# Altium PCB AMU_POC_final.PcbDoc
Units mm, origin at the board's own origin, x right, y up, seen from the top; angles counter-clockwise.
Board outline 33 x 111 mm, 4 copper layers (Top Layer, Mid-Layer 1, GNDplane, Bottom Layer); 83 components, 77 nets, 258 pads, 120 vias.
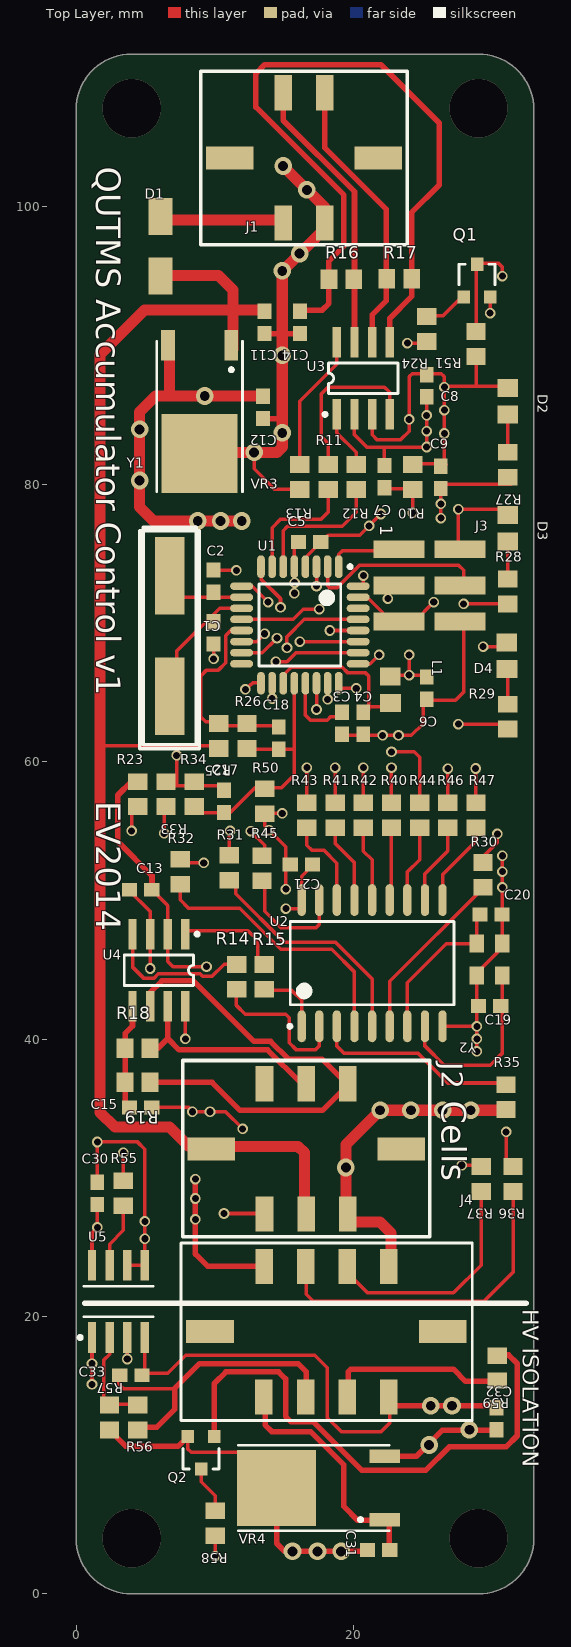
[diagram p0: Top Layer view]
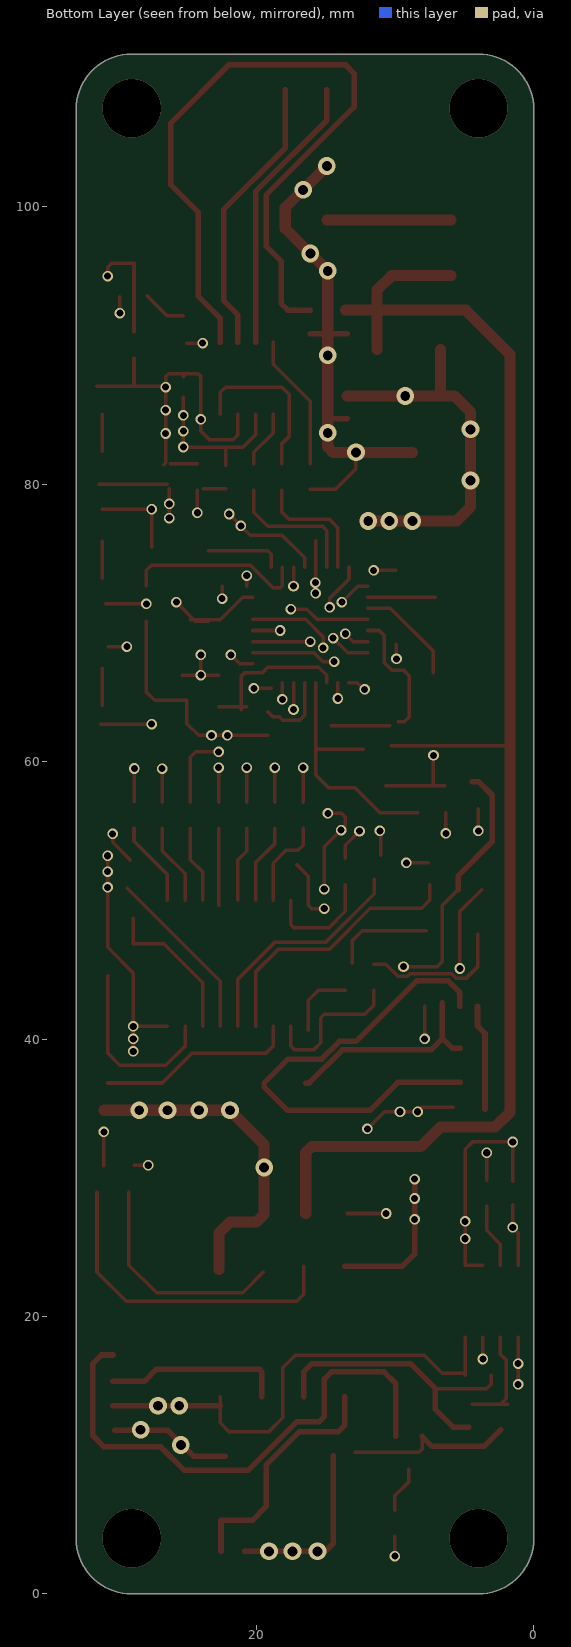
[diagram p1: Bottom Layer view, seen from below]
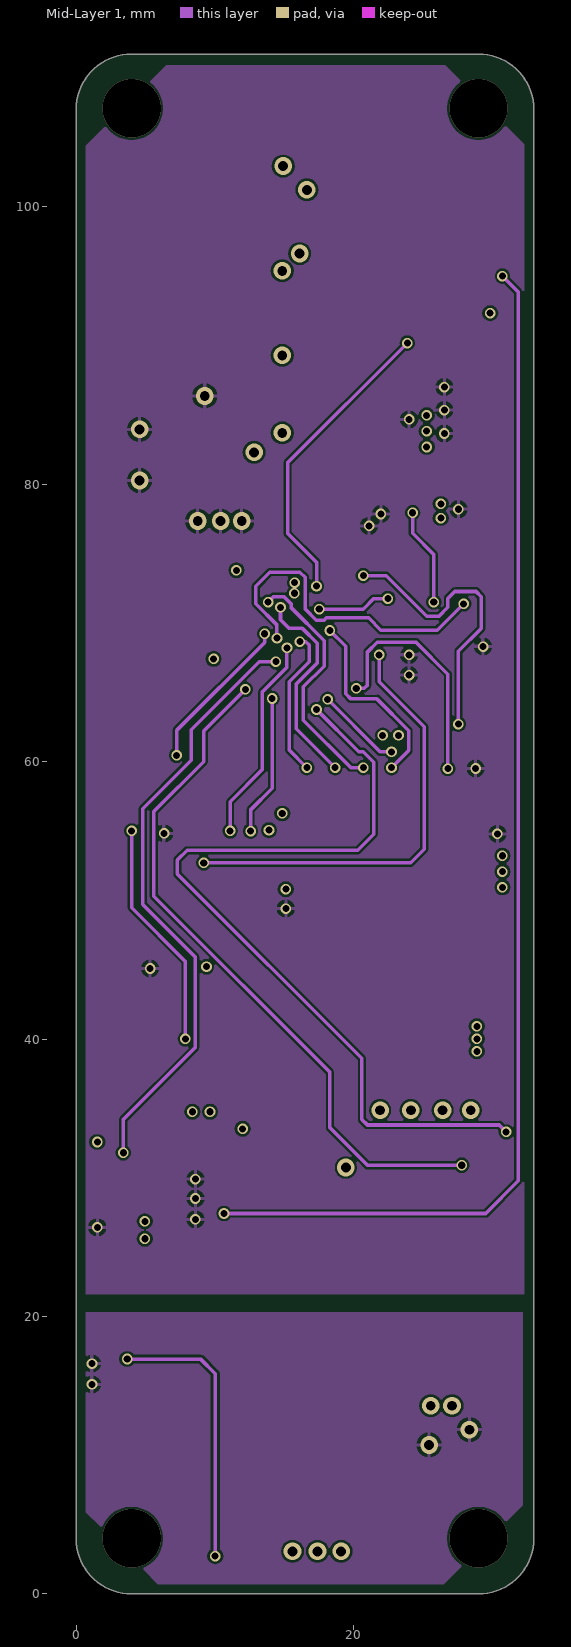
[diagram p2: Mid-Layer 1]
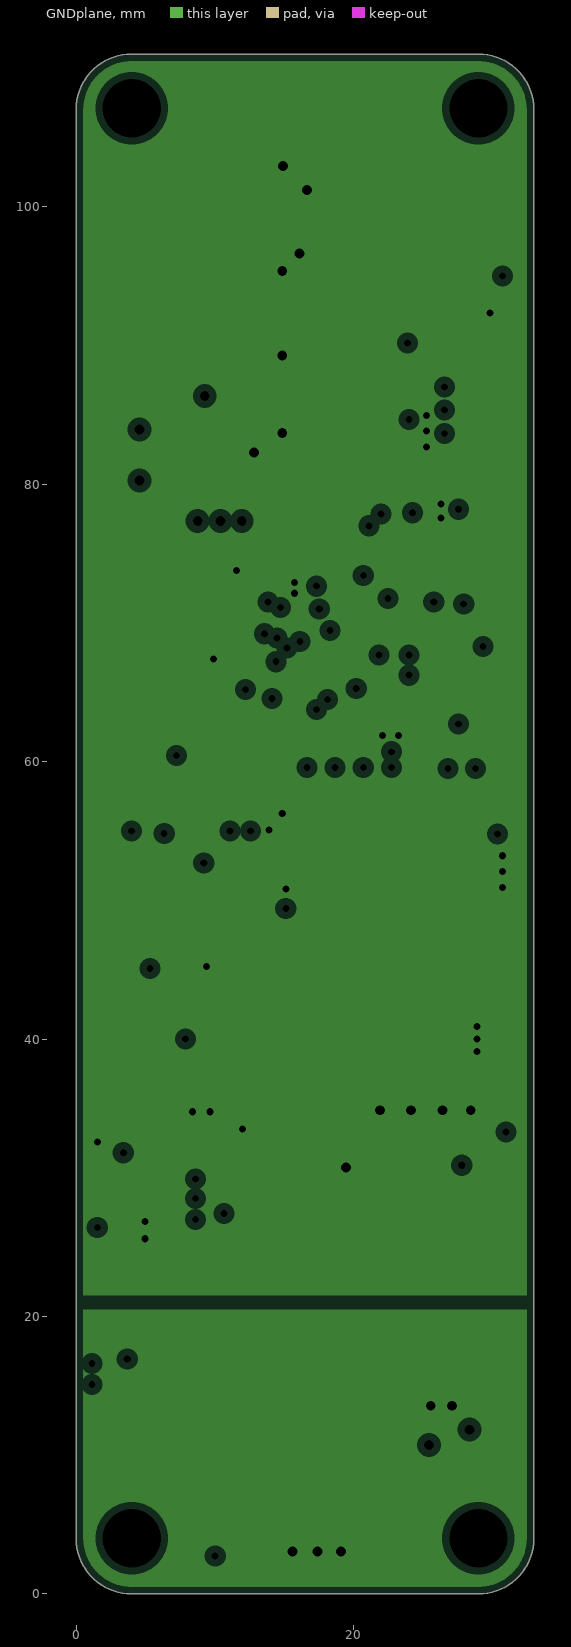
[diagram p3: GNDplane, clearances drawn from the general rule]
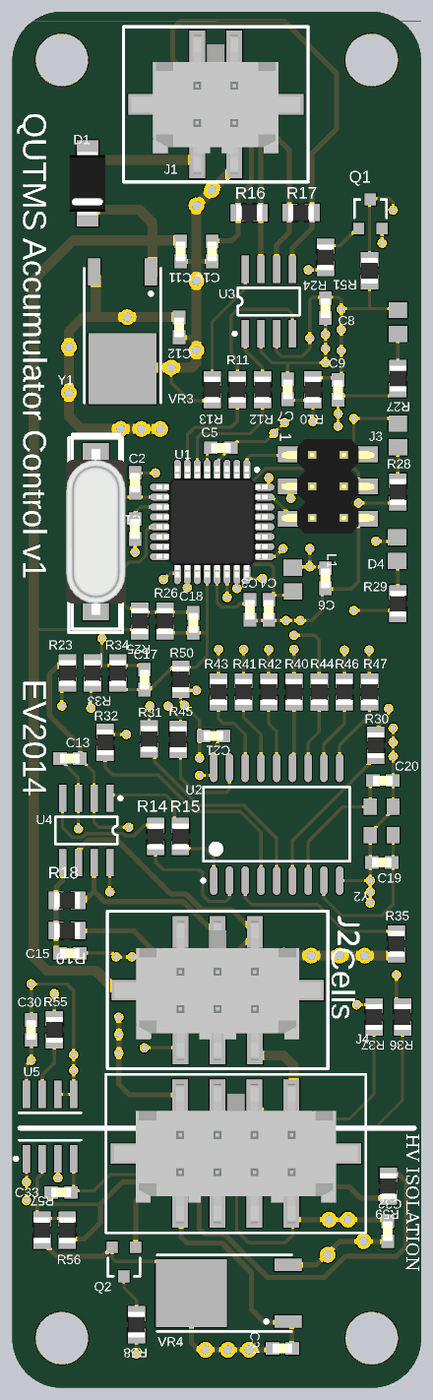
[diagram p4: 3D render of the assembled board from above, using the file's embedded part models]

## Layer stack, top to bottom
Top Solder: solder mask 0.0102, Solder Resist, Dk 3.5
Top Layer: signal copper 0.0356
Dielectric1: core 0.32, FR-4, Dk 4.8
Mid-Layer 1: signal copper 0.0356
Dielectric2: prepreg 0.32, FR-4, Dk 4.8
GNDplane: plane copper 0.0356, net (Multiple Nets)
Dielectric3: core 0.32, FR-4, Dk 4.8
Bottom Layer: signal copper 0.0356
Bottom Solder: solder mask 0.0102, Solder Resist, Dk 3.5

## Board outline
0,4 ccw(c4,4) 4,0 29,0 ccw(c29,4) 33,4 33,107 ccw(c29,107) 29,111 4,111 ccw(c4,107) 0,107

## Design rules (kind name [scope] priority, off if disabled: settings)
Clearance [All] p1: gap=0.18
FabricationTestPointUsage TestPointUsage [All] p1: valid=0 allowmultiple=FALSE
FabricationTestpoint Testpoint [All] p1: side=3 testpointundercomponent=TRUE minsize=1.016 maxsize=2.54 preferedsize=1.524 minholesize=0 maxholesize=1.016 preferedholesize=0.813 testpointgrid=0.025 allowsidetop=TRUE allowsidebottom=TRUE usegrid=TRUE gridtolerance=0
PlaneClearance [All] p1: clearance=0.508
PlaneConnect [All] p1: planeconnectstyle=Relief reliefexpansion=0.508 reliefentries=4 reliefconductorwidth=0.254 reliefairgap=0.254
PolygonConnect [All] p1: connectstyle=Relief reliefconductorwidth=0.254 reliefentries=4 polygonreliefangle="90 Angle" airgapwidth=0.254
RoutingVias [All] p1: holewidth=0.711 width=1.27 viastyle="Through Hole" minholewidth=0.2 minwidth=0.5 maxholewidth=10 maxwidth=10
SilkToSolderMaskClearance SilkscreenOverComponentPads [IsPad] p1: minsilkscreentomaskgap=0.254 clearancetoexposedcopper=TRUE
SolderMaskExpansion SolderMaskExpansion_1 [(IsVia)] p1: expansion=-1
SolderMaskExpansion [All] p2: expansion=0.106
Width [All] p1: maxlimit=10 minlimit=0.2 preferedwidth=0.254 minimp=50.000000 maximp=50.000000 favimp=50.000000
25 further rules are at their usual default settings.

## Components (designator, comment, footprint, x,y, rotation, side; value= is the part's Value field where it differs from the comment)
C1 "Cap Semi" 0603C 9.906,72.985 r270 top
C2 "Cap Semi" 0603C 9.906,69.302 r90 top
C3 "Cap Semi" 0603C 19.177,62.737 r270 top
C4 "Cap Semi" 0603C 20.701,62.737 r270 top
C5 "Cap Semi" 0603C 16.803,75.818 r180 top
C6 "Cap Semi" 0603C 25.273,65.277 r270 top
C7 "Cap Semi" 0603C 22.225,80.517 r270 top
C8 "Cap Semi" 0603C 25.273,87.121 r90 top
C9 "Cap Semi" 0603C 26.289,80.517 r90 top
C11 "Cap Semi" 0603C 13.589,91.693 r90 top
C12 "Cap Semi" 0603C 13.462,85.558 r90 top
C13 "Cap Semi" 0603C 4.619,50.758 r180 top
C14 "Cap Semi" 0603C 16.129,91.693 r90 top
C15 "Cap Semi" 0603C 4.625,35.05 r180 top
C17 "Cap Semi" 0603C 10.668,57.149 r90 top
C18 "Cap Semi" 0603C 14.605,61.721 r90 top
C19 "Cap Semi" 0603C 29.784,42.376 r180 top
C20 "Cap Semi" 0603C 29.884,48.976 r180 top
C21 "Cap Semi" 0603C 16.256,52.577 r0 top
C30 "Cap Semi" 0603C 1.524,28.892 r90 top
C31 "Cap Semi" 0603C 21.775,3.175 r180 top
C32 "Cap Semi" 0603C 30.3,12.65 r90 top
C33 "Cap Semi" 0603C 3.928,15.76 r180 top
D1 "1N4004" DO-214AC 6.075,97.15 r270 top
D2 "Green" 2012[0805]_LED 31.115,85.978 r180 top
D3 "Yellow" 2012[0805]_LED 31.115,76.834 r180 top
D4 "Red" 2012[0805]_LED 31.05,67.65 r180 top
J1 "Header 2X2" "MOLEX 4 PIN" 16.425,103.525 r0 top
J2 "Header 3X2" "Molex 6 Pin" 16.575,32.05 r0 top
J3 "ISP header" "ISP Header" 25.473,72.697 r270 top
J4 "Header 4X2" MOLEX_8 18.05,18.9 r0 top
L1 "Inductor" 2012[0805]_IND 23.4,66.8 r180 top
Q1 "2N7002" SOT23A 28.9,94.675 r0 top
Q2 "2N7002" SOT23A 9.008,10.172 r180 top
R10 "Res1" 2012[0805]_Res 24.257,80.517 r90 top
R11 "Res1" 2012[0805]_Res 18.161,80.517 r270 top
R12 "Res1" 2012[0805]_Res 20.193,80.517 r90 top
R13 "Res1" 2012[0805]_Res 16.129,80.517 r90 top
R14 "Res1" 2012[0805]_Res 11.575,44.475 r270 top
R15 "Res1" 2012[0805]_Res 13.575,44.475 r270 top
R16 "Res3" 2012[0805]_Res 19.125,94.775 r180 top
R17 "Res3" 2012[0805]_Res 23.3,94.8 r180 top
R18 "Res3" 2012[0805]_Res 4.425,39.325 r0 top
R19 "Res3" 2012[0805]_Res 4.425,36.875 r180 top
R23 "Res1" 2012[0805]_Res 4.445,57.657 r270 top
R24 "Res1" 2012[0805]_Res 25.273,91.185 r90 top
R25 "Res1" 2012[0805]_Res 10.287,61.848 r90 top
R26 "Res1" 2012[0805]_Res 12.319,61.848 r270 top
R27 "Res1" 2012[0805]_Res 31.115,81.406 r90 top
R28 "Res1" 2012[0805]_Res 31.115,72.262 r270 top
R29 "Res1" 2012[0805]_Res 31.115,63.245 r270 top
R30 "Res1" 2012[0805]_Res 29.328,51.828 r270 top
R31 "Res1" 2012[0805]_Res 11.04,52.336 r270 top
R32 "Res1" 2012[0805]_Res 7.493,52.069 r270 top
R33 "Res1" 2012[0805]_Res 6.477,57.657 r90 top
R34 "Res1" 2012[0805]_Res 8.509,57.657 r270 top
R35 "Res1" 2012[0805]_Res 30.988,35.813 r270 top
R36 "Res1" 2012[0805]_Res 31.496,29.908 r90 top
R37 "Res1" 2012[0805]_Res 29.196,29.908 r90 top
R40 "Res1" 2012[0805]_Res 22.733,56.133 r270 top
R41 "Res1" 2012[0805]_Res 18.669,56.133 r270 top
R42 "Res1" 2012[0805]_Res 20.701,56.133 r270 top
R43 "Res1" 2012[0805]_Res 16.637,56.133 r270 top
R44 "Res1" 2012[0805]_Res 24.775,56.125 r270 top
R45 "Res1" 2012[0805]_Res 13.4,52.3 r270 top
R46 "Res1" 2012[0805]_Res 26.797,56.133 r270 top
R47 "Res1" 2012[0805]_Res 28.829,56.133 r270 top
R50 "Res1" 2012[0805]_Res 13.589,57.149 r270 top
R51 "Res1" 2012[0805]_Res 28.825,90.1 r90 top
R55 "Res1" 2012[0805]_Res 3.4,28.88 r270 top
R56 "Res1" 2012[0805]_Res 4.436,12.712 r90 top
R57 "Res1" 2012[0805]_Res 2.404,12.712 r90 top
R58 "Res1" 2012[0805]_Res 10.024,5.092 r90 top
R59 "Res1" 2012[0805]_Res 30.344,16.268 r90 top
U1 "ATmega64M1-16AU" 32A_N 16.129,69.849 r270 top
U2 "MCP2515-I/SO" SOL-18_N 21.336,45.465 r90 top locked
U3 "TJA1040" SO8 20.701,87.629 r0 top
U4 "TJA1040" SO8 5.969,44.957 r180 top
U5 "ACPL-C87A" SO8 3.048,21.081 r0 top
VR3 "MC78M05ACDT" 369A-13 8.9,85.9 r180 top
VR4 "MC78M05ACDT" 369A-13 18.152,7.632 r90 top
Y1 "16MHz" Crystal 5.7,76.2 r270 top
Y2 "XTAL" MCP2515_XTAL 28.2,43.75 r0 top

## Footprints (in the part's own frame and the unit in brackets; to place one, negate y for a bottom-side part, rotate by r counter-clockwise, add the part's x,y. Pads: shape width x height; smd on the part's side, far side on the other; paste and mask are expansions set on the pad)
32A_N [mm] "Thin QFP, 32-Leads, Body 7x7mm, Pitch 0.8mm, IPC Medium Density"
  oval 1.65x0.55 smd: 1(-4.2,2.8) 2(-4.2,2) 3(-4.2,1.2) 4(-4.2,0.4) 5(-4.2,-0.4) 6(-4.2,-1.2) 7(-4.2,-2) 8(-4.2,-2.8) 17(4.2,-2.8) 18(4.2,-2) 19(4.2,-1.2) 20(4.2,-0.4) 21(4.2,0.4) 22(4.2,1.2) 23(4.2,2) 24(4.2,2.8)
  oval 0.55x1.65 smd: 9(-2.8,-4.2) 10(-2,-4.2) 11(-1.2,-4.2) 12(-0.4,-4.2) 13(0.4,-4.2) 14(1.2,-4.2) 15(2,-4.2) 16(2.8,-4.2) 25(2.8,4.2) 26(2,4.2) 27(1.2,4.2) 28(0.4,4.2) 29(-0.4,4.2) 30(-1.2,4.2) 31(-2,4.2) 32(-2.8,4.2)
  silkscreen extent -4.32,-2.95 2.95,3.75, body extent -4.5,-4.5 4.5,4.5, height 1.1
369A-13 [mm] "TO, Flat Index; 3 In-Line, Axial Leads; Body Dia. 4.6mm; Lead Dia. 0.5 mm (max)"
  rect 1x2.2 smd: 1(-2.285,-4.1) 3(2.285,-4.1)
  rect 5.5x5.7 smd: 4(0,3.7)
  silkscreen extent -3.09,-4.4 3.08,6.45
0603C [mm] "Chip Resistor; Body 1.6 x 0.8 mm (LxW typ)"
  rect 1.1x1 smd: 1(-0.825,0) 2(0.775,0)
  body extent -0.82,-0.4 0.78,0.4, height 0.8
2012[0805]_IND [mm]
  rect 1.5x1.3 smd: 1(0.75,0.65) 2(0.748,2.566)
  body extent 0.1,0.2 1.4,3, height 1.5
2012[0805]_LED [mm]
  rect 1.5x1.3 smd: 1(0,-0.95) 2(-0.002,0.966)
  body extent -0.65,-1.4 0.65,1.4, height 1
2012[0805]_Res [mm] "2012[0805] Resistor"
  rect 1.2x1.4 smd: 1(-0.9,0) 2(0.9,0)
  body extent -1.05,-0.67 1.05,0.68, height 0.6
Crystal [mm]
  rect 5.6x2.1 smd: 1(2.8,1.05) 2(11.5,1.05)
  silkscreen extent -0.7,-0.85 15,2.95, body extent 0.45,-1.35 13.85,3.45, height 4
DO-214AC [mm]
  rect 2.65x1.75 smd: 1(-2.15,0) 2(2.15,0)
  body extent -2.64,-1.47 2.64,1.45, height 2.41
"ISP Header" [mm]
  rect 1.27x3.68 smd: 1(-2.6,-2.2) 2(-2.6,2.2) 3(0,-2.2) 4(0,2.2) 5(2.6,-2.2) 6(2.6,2.2)
  body extent -3.81,-3.75 3.81,3.75, height 9.7
MCP2515_XTAL [mm]
  rect 1.05x1.3 smd: 1(0.684,3.126) 2(2.534,0.826) 3(0.684,0.826) 4(2.534,3.126)
"MOLEX 4 PIN" [mm]
  rect 1.27x2.54 smd: 1(1.5,-4.7) 2(-1.5,-4.7) 3(1.5,4.7) 4(-1.5,4.7)
  rect 3.43x1.65 smd: 5(-5.35,0) 6(5.35,0)
  silkscreen extent -7.45,-6.25 7.45,6.25, body extent -6.83,-5.61 6.83,5.59, height 9.95
"Molex 6 Pin" [mm]
  rect 1.27x2.54 smd: 1(3,-4.675) 2(0,-4.675) 3(-3,-4.675) 4(3,4.725) 5(0,4.725) 6(-3,4.725)
  rect 3.43x1.65 smd: 8(-6.85,0.025) 9(6.85,0.025)
  silkscreen extent -8.9,-6.3 8.9,6.4, body extent -8.33,-5.61 8.33,5.59, height 9.95
MOLEX_8 [mm] "SOP, 8-Leads, Body 5.3x5.3mm, Pitch 1.27mm, IPC High Density"
  rect 1.27x2.54 smd: 1(4.485,-4.7) 2(1.485,-4.7) 3(-1.5,-4.7) 4(-4.515,-4.7) 5(4.485,4.7) 6(1.485,4.7) 7(-1.5,4.7) 8(-4.502,4.708)
  rect 3.43x1.65 smd: ""(-8.4,0) ""(8.37,0)
  silkscreen extent -10.5,-6.4 10.5,6.4, body extent -9.82,-5.61 9.82,5.59, height 9.95
SO8 [mm] "SOP, 8-Leads, Body 5.3x5.3mm, Pitch 1.27mm, IPC High Density"
  rect 0.6x2.2 smd: 1(-1.905,-2.6) 2(-0.635,-2.6) 3(0.635,-2.6) 4(1.905,-2.6) 5(1.905,2.6) 6(0.635,2.6) 7(-0.635,2.6) 8(-1.905,2.6)
  silkscreen extent -2.88,-2.72 2.5,1.1
SOL-18_N [mm] "SOIC, 18-Leads, Body 11.6x7.5mm, Pitch 1.27mm, IPC Medium Density"
  oval 2.3x0.6 smd: 1(-4.55,5.08) 2(-4.55,3.81) 3(-4.55,2.54) 4(-4.55,1.27) 5(-4.55,0) 6(-4.55,-1.27) 7(-4.55,-2.54) 8(-4.55,-3.81) 9(-4.55,-5.08) 10(4.55,-5.08) 11(4.55,-3.81) 12(4.55,-2.54) 13(4.55,-1.27) 14(4.55,0) 15(4.55,1.27) 16(4.55,2.54) 17(4.55,3.81) 18(4.55,5.08)
  silkscreen extent -4.67,-5.9 3,6.05, body extent -3.8,-5.95 3.8,5.95, height 2.65
SOT23A [mm] "SOT-23; 3 Leads; Body 3.0 x 2.5 mm, inc. leads (LxW max)"
  rect 0.9x0.95 smd: 1(-0.95,-1.175) 2(0.95,-1.175) 3(0,1.175)
  silkscreen extent -1.3,-0.3 1.3,1.18

## Part data
C1 C2 C3 C4 C5 C6 C7 C8 C9 C11 C12 C13 C14 C15 C17 C18 C19 C20 C21 C30 C31 C32 C33: "Capacitor (Semiconductor SIM Model)"
D1: library part Diode, "Default Diode"
D2 D3 D4: library part LED2, "Typical RED, GREEN, YELLOW, AMBER GaAs LED"
J1: "Header, 2-Pin, Dual row"
J2: "Header, 3-Pin, Dual row"
J3: library part "Header 3X2", "Header, 3-Pin, Dual row"
J4: "Header, 4-Pin, Dual row"
Q1 Q2: library part MOSFET-N, "N-Channel MOSFET"
R10 R11 R12 R13 R14 R15 R16 R17 R18 R19 R23 R24 R25 R26 R27 R28 R29 R30 R31 R32 R33 R34 R35 R36 R37 R40 R41 R42 R43 R44 R45 R46 R47 R50 R51 R55 R56 R57 R58 R59: "Resistor"
U1: library part ATmega8-16AC, "8-Bit AVR Microcontroller with 8K Bytes of In-System Programmable Flash Memory"
U2: "Stand-Alone CAN Controller With SPI Interface, 18-Pin SOIC, Industrial Temperature"
U5: library part AT90S2343-10SI, "Isolated CAN transceiver"
VR3 VR4: "Three-Terminal Medium Current Positive Voltage Regulator"
Y1: library part XTAL, "Crystal Oscillator"
Y2: "Crystal Oscillator"

## Via types
v1: diameter 0.762, hole 0.508, Top Layer to Bottom Layer, 91 vias
v2: diameter 1.27, hole 0.711, Top Layer to Bottom Layer, 25 vias
v3: diameter 4.2, hole 4.2, Top Layer to Bottom Layer, 4 vias

## Nets (pads, with @x,y where several pads share a name; then routed paths per layer and width w, separated by ;. In a path a pad name is that pad's centre, name@x,y a point inside that pad or via, vN(x,y) a via of type N, cw(c..) or ccw(c..) an arc to the next point about the centre after c; other vN are vias at no path point)
AGND: C17.1 C18.1 R26.2 R34.2 R50.1 U1.20 | length 18.5
  Top Layer w0.254: R34.2@8.382,56.326 11.115,56.326 12.888,58.099 14.793,58.099 15.729,59.035 U1.20@15.729,65.699 ; R26.2@12.319,60.898 15.729,60.898
Aref: C3.1 U1.21 | length 5.4
  Top Layer w0.254: U1.21@16.529,65.699 16.529,63.353 16.891,62.991 18.095,62.991 18.349,63.245 18.835,63.245 C3.1@19.177,63.587
AVCC: C4.1 L1.2 U1.19 | length 11.6
  Top Layer w0.254: U1.19@14.929,65.699 14.929,66.229 15.5,66.8 19.178,66.8 19.558,66.42 20.828,66.42 21.082,66.166 C4.1@21.082,63.753 ; C4.1@20.701,63.946 L1.2@22.733,63.946
AVR_RXCAN: R11.2 U1.7 | length 8.9
  Top Layer w0.254: U1.7@14.129,73.999 14.129,76.866 14.732,77.469 17.653,77.469 18.161,77.977 R11.2@18.161,79.567
AVR_TXCAN: R12.1 U1.6 | length 10.1
  Top Layer w0.254: U1.6@14.929,73.999 14.929,76.65 15.24,76.961 19.177,76.961 20.193,77.977 R12.1@20.193,79.567
BATT_SENSE_GATE: Q2.1 R59.2 | length 38.5
  Top Layer w0.4: Q2.1 9.958,15.158 10.8,16 14.6,16 15.1,15.5 15.1,12.8 15.5,12.4 17.1,12.4 20.6,8.9 25.2,8.9 26.9,10.6 31,10.6 31.8,11.4 31.8,16.6 31.182,17.218 R59.2@30.344,17.218
BATT_SENSE_GND: C31.2 C32.2 C33.1 J4.1 Q2.2 R57.1 U5.4 VR4.4 | length 60.5
  Top Layer w0.254: C33.1@4.953,15.76 U5.4 ; C33.1@4.953,15.9 6.6,15.9 7.9,17.2 17.2,17.2 18.1,16.3 18.1,12.7 19.1,11.7 22,11.7 22.624,12.324 J4.1@22.624,14.213 ; Q2.2 8.058,10.442 8.3,10.2 VR4.4@12.9,10.2
  Top Layer w0.4: R57.1 3.591,10.625 7.336,10.625 Q2.2 ; VR4.4@14.452,9.948 14.452,3.648 15.04,3.06 C31.2@20.858,3.06 ; J4.1@22.6,13.562 C32.2@30.344,13.562
  other v2: 15.6,3.06 17.4,3.06 19.1,3.06 25.562,13.562 27.1,13.562
BATT_SENSE_PWR: C31.1 J4.4 VR4.1 | length 17.8
  Top Layer w0.4: J4.4@13.624,14.213 13.624,12.176 14.1,11.7 16.9,11.7 19.3,9.3 19.3,6.3 20.3,5.3 22.558,5.3 C31.1@22.558,3.06
BATT_SENSE_SHDN1: J4.2 R59.1 | length 13
  Top Layer w0.4: J4.2@19.624,14.213 19.624,16.024 19.8,16.2 27.2,16.2 28.082,15.318 R59.1@30.344,15.318
BATT_SENSE_SHDN2: R58.1 U5.3 | length 22.9
  Top Layer w0.254: v1(3.683,16.93) U5.3 ; v1(10.024,2.724) R58.1@10.024,4.142
  Mid-Layer 1 w0.254: v1(3.683,16.93) 8.97,16.93 10.024,15.876 v1(10.024,2.724)
BATT_SENSE_SIG: C33.2 J4.3 R56.1 | length 21.5
  Top Layer w0.254: C33.2@3.078,15.76 3.078,15.122 3.4,14.8 7.1,14.8
  Top Layer w0.4: R56.1@4.706,12 5.8,12 7.1,13.3 7.1,14.8 8.9,16.6 16,16.6 16.6,16 J4.3@16.6,14.2
BATT_SENSE_SOURCE: Q2.3 R58.2 | length 3.4
  Top Layer w0.254: Q2.3 9.008,8.092 10.024,7.076 R58.2@10.024,6.042
BATT_SENSE_VDD: C32.1 U5.1 VR4.3 | length 12.1
  Top Layer w0.254: v1(1.143,15.1) U5.1
  Top Layer w0.4: VR4.3 24.517,9.917 26.4,11.8 C32.1@30.2,11.8
  other v1: 1.143,16.6
  other v2: 25.449,10.733 28.349,11.833
BATT_SENSE_VIN: R56.2 R57.2 U5.2 | length 7.7
  Top Layer w0.254: R57.2@1.896,13.67 R56.2@4.436,13.67 ; R57.2@2.413,13.662 2,14.075 2,16.863 2.413,17.276 U5.2
BMS_GLV: D1.1 J1.2 | length 9
  Top Layer w0.8: D1.1@5.965,99.049 J1.2@14.925,99.049
CANH_BMS: J2.5 R18.2 U4.7 | length 15.3
  Top Layer w0.4: R18.2 5.883,39.325 6.604,40.046 ; U4.7@6.604,42.611 U4.7 6.604,40.046 ; J2.5@16.449,36.821 16.209,36.821 13.809,39.221 7.429,39.221 6.604,40.046
CANH_CHASSIS: J1.4 R16.1 U3.7 | length 20.3
  Top Layer w0.4: J1.4@14.925,108.449 14.925,106.232 20.066,101.091 U3.7
CANL_BMS: J2.4 R19.1 U4.6 | length 34.2
  Top Layer w0.4: R19.1 9.8,36.875 11.825,34.85 17.75,34.85 J2.4@19.449,36.549 ; U4.6 5.334,43.352 6.175,44.193 8.457,44.193 12.825,39.825 14.025,39.825 15.3,38.55 17.72,38.55 J2.4@19.449,36.821
CANL_CHASSIS: J1.3 R17.2 U3.6 | length 20.5
  Top Layer w0.4: J1.3@17.925,108.449 17.925,104.248 22.352,99.821 22.352,93.217 21.336,92.201 U3.6
CURRENTSENSE1: J4.6 R37.1 | length 16.4
  Top Layer w0.254: J4.6@19.5,23.2 21,21.7 27.2,21.7 29.196,23.696 R37.1@29.196,28.958
CURRENTSENSE2: R37.2 U1.17 | length 52.5
  Top Layer w0.254: v1(12.2,65.2) 12.762,65.699 U1.17@13.329,65.699 ; v1(27.8,30.9) R37.2@28.8,30.9
  Mid-Layer 1 w0.254: v1(12.2,65.2) 9.2,62.2 9.2,60 5.6,56.4 5.6,50.3 18.3,37.6 18.3,33.6 21,30.9 v1(27.8,30.9)
CURRENTTEMP1: J4.7 R36.1 | length 23.7
  Top Layer w0.254: J4.7@16.6,23.6 16.6,21.6 17.1,21.1 29.4,21.1 31.496,23.196 R36.1@31.496,28.958
CURRENTTEMP2: R36.2 U1.22 | length 65.2
  Top Layer w0.254: v1(17.329,63.753) U1.22@17.329,65.699 ; R36.2@31,30.875 v1(31,33.3)
  Mid-Layer 1 w0.254: v1(17.329,63.753) 20.377,60.705 20.701,60.705 21.463,59.943 21.463,54.763 20.3,53.6 8,53.6 7.3,52.9 7.3,51.9 20.6,38.6 20.6,34.2 21,33.8 30.5,33.8 v1(31,33.3)
GLV_GND: C1.1 C2.1 C3.2 C4.2 C5.2 C6.2 C7.1 C8.1 C9.1 C11.1 C12.1 C13.1 C14.1 C15.1 C19.2 C20.1 C21.1 C30.2 J1.1 J2.1 J3.6 J4.5 Q1.2 R13.1 R23.1 R27.1 R35.2 R50.2 U1.5 U2.9 U3.2 U4.2 U5.5 U5.6 VR3.4 Y2.3 Y2.4 | length 170.9
  Top Layer w0.254: C30.2@1.524,29.742 v1(1.524,32.576) 4.424,32.576 4.953,32.047 U5.5 U5.6 ; C13.1@5.469,50.758 6.604,49.623 6.604,45.592 6.985,45.211 v1(9.398,45.211) ; C15.1@5.803,35.075 8.104,35.075 8.423,34.756 10.769,34.756 v1(12,33.525) ; v1(9.906,67.4) C2.1@9.906,68.452 ; C1.1@9.955,73.786 v1(11.557,73.786) ; v2(12.827,82.295) 12.827,81.098 14.308,79.617 R13.1 ; v1(14.859,56.26) 13.843,56.26 13.589,56.006 13.589,55.371 15.113,53.847 v1(15.113,50.799) ; v1(15.729,72.135) C5.2@15.729,75.926 ; C3.2@19.177,61.887 24.169,61.887 25.019,62.737 25.019,64.427 27.344,64.427 27.933,65.016 J3.6@27.933,70.125 ; U3.2 20.066,83.565 20.955,82.676 v1(25.273,82.676) C8.1@25.273,86.271 ; C7.1@22.225,81.367 22.225,82.676 ; v1@26.289,77.342 C9.1@26.289,79.667 ; U2.9 v1(28.884,40.915) ; C9.1@26.416,80.009 R27.1@31.369,80.009 ; v1(28.884,39.115) 28.884,44.758 Y2.4@30.734,46.608 ; v1(29.845,92.328) Q1.2@29.845,93.5 ; Y2.4@30.734,46.735 v1(30.734,53.212)
  Top Layer w0.4: R23.1 3.982,58.557 3,57.575 3,54.225 5.469,51.756 C13.1@5.469,50.758 ; C12.1@13.462,84.708 14.859,84.708 ; C11.1@13.462,90.843 C14.1@16.129,90.843
  Top Layer w0.8: VR3.4@8.763,82.295 v2(12.827,82.295) 14.478,82.295 14.859,82.676 v2(14.859,95.376) 17.925,98.442 17.925,99.93 v2(14.922,102.932) ; J4.5@22.7,23.4 22.7,26 21.9,26.8 20,26.8 19.449,27.351 19.449,32.402 v2(21.91,34.863) R35.2@30.988,34.863
  other v1: 4.953,25.6 4.953,26.853 8.382,34.756 9.652,34.756 28.884,40.004 30.734,50.926 30.734,52.069 13.903,55.057 22.098,61.887 23.241,61.887 15.748,72.897 26.289,77.557 26.289,78.573 25.273,83.819 25.273,84.962
  other v2: 19.449,30.733 24.13,34.863 26.416,34.863 28.448,34.863 14.859,83.692 14.859,89.28 16.109,96.626 16.637,101.218
GLV_VCC: C5.1 C6.1 C8.2 C9.2 C12.2 C13.2 C21.2 C30.1 D2.1 D3.1 D4.1 J3.2 J4.8 L1.1 R10.2 R30.1 R33.1 R47.1 R51.1 U1.4 U2.18 U3.3 U4.3 U5.8 VR3.3 | length 105.9
  Top Layer w0.254: U5.8 1.143,26.043 v1(1.524,26.424) C30.1@1.524,28.042 ; C13.2@3.769,50.758 5.334,49.193 v1(5.334,45.084) ; v1(6.35,54.824) R33.1@6.35,56.326 ; v1(15.113,49.402) 16.002,49.402 16.256,49.656 16.256,51.727 C21.2@17.106,52.577 ; U1.4@16.529,73.999 16.529,74.694 18.161,76.326 20.447,76.326 v1(21.971,77.85) ; U3.3 21.336,83.565 21.717,83.184 23.368,83.184 24.003,83.819 24.003,87.756 24.218,87.971 26.328,87.971 26.543,87.756 26.543,81.533 C9.2@26.67,81.406 ; L1.1@22.733,66.227 C6.1@25.334,66.227 ; v1(24.003,66.227) v1(24.003,67.69) ; R10.2@24.257,81.467 C9.2@26.223,81.467 ; C8.2@25.019,88.01 C8.2@25.273,87.756 ; v1@26.543,87.055 D2.1@31.496,87.055 ; J3.2@27.559,75.437 v1(27.559,78.192) D3.1@31.115,78.192 ; R47.1@28.8,57.112 v1(28.8,59.5) ; 28.829,87.055 R51.1@28.829,89.092 ; R30.1@29.1,52.9 30.373,54.173 v1(30.373,54.79) ; v1(29.337,68.286) D4.1@30.695,68.286
  Top Layer w0.4: v1(8.6,29.9) 8.6,24.5 9.479,23.621 J4.8@13.637,23.621
  Top Layer w0.8: 6.732,86.359 VR3.3@6.732,89.697 ; v2(11.938,77.342) 5.588,77.342 4.572,78.358 4.572,85.216 5.715,86.359 C12.2@13.462,86.359
  other v1: 8.6,27 8.6,28.5 21.118,76.997 26.543,83.653 24.003,84.669 26.543,85.343 26.543,86.994
  other v2: 8.763,77.342 10.414,77.342 4.572,80.263 4.572,83.946 9.271,86.359
GLV_VCC_ADC: C17.2 R33.2 R34.1 U1.14 | length 19.7
  Top Layer w0.254: R33.2@6.438,58.253 C17.2@10.668,58.253 ; 7.239,58.253 v1(7.239,60.451) ; U1.14@11.979,68.649 13.024,68.649 v1(13.589,69.214)
  Mid-Layer 1 w0.254: v1(7.239,60.451) 7.239,62.239 13.589,68.589 v1(13.589,69.214)
GLV_VIN: C11.2 D1.2 J2.2 J2.8 R25.1 VR3.1 | length 106.7
  Top Layer w0.254: 1.73,61.152 R25.1@10.287,61.152
  Top Layer w0.8: D1.2@5.965,95.037 10.245,95.037 11.302,93.98 VR3.1@11.302,89.697 ; C11.2@13.589,92.543 4.914,92.543 1.73,89.359 1.73,34.718 2.794,33.654 6.731,33.654 8.128,32.257 16.002,32.257 16.449,31.81 J2.2@16.449,27.421
GLV_VIN_ADC: C18.2 R25.2 R26.1 U1.13 | length 13.6
  Top Layer w0.254: R25.2@9.779,62.864 9.336,62.864 9,63.2 9,66.2 9.4,66.6 10.26,66.6 10.795,67.135 10.795,69.087 11.157,69.449 U1.13@11.979,69.449 ; R25.2@10.375,62.571 C18.2@14.605,62.571
ISO_VOUT1: R55.2 U5.7 | length 4.7
  Top Layer w0.254: U5.7 2.413,25.213 3.4,26.2 R55.2@3.4,27.93
ISO_VOUT2: R55.1 U1.26 | length 51.9
  Top Layer w0.254: R55.1@3.4,29.83 v1(3.4,31.8) ; v1(14.4,67.2) 15.2,67.2 15.849,67.849 U1.26@20.279,67.849
  Mid-Layer 1 w0.254: v1(3.4,31.8) 3.4,34.2 8.6,39.4 8.6,45.9 4.8,49.7 4.8,56.6 8.3,60.1 8.3,62.3 13.2,67.2 v1(14.4,67.2)
LED_green: D2.2 R27.2 | length 2.7
  Top Layer w0.254: R27.2@31.115,82.356 D2.2@31.115,85.028
LED_RED1: D4.2 R29.1 | length 2.7
  Top Layer w0.254: R29.1@31.115,64.068 D4.2@31.115,66.74
LED_RED2: R29.2 U1.32 | length 25.3
  Top Layer w0.254: U1.32@20.701,72.643 v1(20.701,73.405) ; v1(27.559,62.698) R29.2@31.242,62.698
  Mid-Layer 1 w0.254: v1(20.701,73.405) 22.352,73.405 25.273,70.484 26.162,70.484 26.797,71.119 26.797,71.754 27.305,72.262 28.829,72.262 29.21,71.881 29.21,69.595 27.559,67.944 v1(27.559,62.698)
LED_YELLOW1: D3.2 R28.1 | length 2.7
  Top Layer w0.254: R28.1@31.115,73.212 D3.2@31.115,75.884
LED_YELLOW2: R28.2 U1.15 | length 29.6
  Top Layer w0.254: U1.15@11.979,67.849 13.427,67.849 v1(14.478,68.9) ; v1(27.94,71.373) R28.2@30.861,71.373
  Mid-Layer 1 w0.254: v1(14.478,68.9) 14.478,69.849 12.954,71.373 12.954,72.643 13.97,73.659 16.129,73.659 16.51,73.278 16.51,71 17.31,70.2 17.877,70.2 18.034,70.357 21.082,70.357 21.971,69.468 26.035,69.468 v1(27.94,71.373)
MCP2515_CLKOUT: R35.1 U2.3 | length 14.5
  Top Layer w0.254: U2.3 18.796,39.496 19.304,38.988 24.638,38.988 26.797,36.829 R35.1@30.734,36.829
MCP2515_CS1: R43.1 U1.27 | length 17.4
  Top Layer w0.254: v1(16.124,68.649) U1.27@20.279,68.649 ; R43.1@16.637,57.083 v1(16.637,59.562)
  Mid-Layer 1 w0.254: v1(16.124,68.649) 16.551,68.649 16.8,68.4 16.8,67.2 15.367,65.767 15.367,60.832 v1(16.637,59.562)
MCP2515_CS2: R43.2 U2.16 | length 6.6
  Top Layer w0.254: R43.2@16.637,55.183 16.637,53.974 17.018,53.593 17.878,53.593 18.796,52.675 U2.16
MCP2515_INT1: R44.1 U1.23 | length 12.8
  Top Layer w0.254: v1(18.129,64.483) U1.23@18.129,65.699 ; v1(22.733,60.705) 24.384,60.705 24.765,60.324 R44.1@24.765,57.083
  Mid-Layer 1 w0.254: v1(18.129,64.483) 21.907,60.705 v1(22.733,60.705)
MCP2515_INT2: R44.2 U2.12 | length 5.5
  Top Layer w0.254: U2.12 23.876,52.04 24.765,52.929 R44.2@24.765,55.183
MCP2515_MISO1: R41.1 U1.8 | length 20.9
  Top Layer w0.254: U1.8@13.329,73.999 13.329,73.157 14.732,71.754 v1(14.732,71.119) ; R41.1@18.669,57.083 v1(18.669,59.562)
  Mid-Layer 1 w0.254: v1(14.732,71.119) 14.732,70.23 15.367,69.595 16.315,69.595 17.385,68.525 17.385,67.103 15.875,65.593 15.875,62.356 v1(18.669,59.562)
MCP2515_MISO2: R41.2 U2.15 | length 5.7
  Top Layer w0.254: R41.2@18.669,55.183 18.669,54.093 20.066,52.696 U2.15
MCP2515_MOSI1: R42.1 U1.9 | length 22.5
  Top Layer w0.254: U1.9@11.979,72.649 12.694,72.649 v1@13.779,71.563 ; R42.1@20.701,57.083 v1(20.701,59.562)
  Mid-Layer 1 w0.254: v1(13.843,71.5) 14.224,71.881 14.986,71.881 15.494,71.373 15.494,71.106 17.881,68.719 17.881,66.88 16.383,65.383 16.383,62.991 19.812,59.562 v1(20.701,59.562)
MCP2515_MOSI2: R42.2 U2.14 | length 5.4
  Top Layer w0.254: R42.2@20.701,55.183 20.701,53.546 21.336,52.911 U2.14
MCP2515_RESET1: R45.1 U1.18 | length 13.7
  Top Layer w0.254: v1(12.573,54.99) 13.589,53.974 R45.1@13.589,53.019 ; v1(14.129,64.547) U1.18@14.129,65.699
  Mid-Layer 1 w0.254: v1(12.573,54.99) 12.573,56.514 14.129,58.07 v1(14.129,64.547)
MCP2515_RESET2: R45.2 U2.17 | length 8.2
  Top Layer w0.254: R45.2@13.589,51.119 13.589,49.211 14.795,48.005 17.272,48.005 17.526,48.259 U2.17
MCP2515_RX0BUF1: R46.1 U1.24 | length 20.8
  Top Layer w0.254: U1.24@18.923,65.277 v1(20.193,65.277) ; R46.1@26.797,57.083 v1(26.797,59.497)
  Mid-Layer 1 w0.254: v1(20.193,65.277) 20.777,65.277 21,65.5 21,67.9 21.7,68.6 24.5,68.6 26.797,66.303 v1(26.797,59.497)
MCP2515_RX0BUF2: R46.2 U2.11 | length 5.9
  Top Layer w0.254: U2.11 25.146,51.905 26.797,53.556 R46.2@26.797,55.183
MCP2515_RX1BF: R47.2 U2.10 | length 6.2
  Top Layer w0.254: U2.10 26.416,51.844 28.829,54.257 R47.2@28.829,55.183
MCP2515_RXCAN1: R14.2 U2.2 | length 10.9
  Top Layer w0.254: R14.2@11.557,43.499 11.557,42.417 12.192,41.782 15.113,41.782 15.367,41.528 15.367,39.725 15.85,39.242 17.272,39.242 17.526,39.496 U2.2
MCP2515_RXCAN2: R14.1 U4.4 | length 10.8
  Top Layer w0.254: U4.4 4.064,45.186 4.854,44.396 5.619,44.396 5.923,44.7 8.936,44.7 9.113,44.523 9.798,44.523 10.674,45.399 R14.1@11.557,45.399
MCP2515_SCK1: R40.1 U1.28 | length 18.3
  Top Layer w0.254: v1(18.288,69.449) U1.28@20.279,69.449 ; R40.1@22.733,57.083 v1(22.733,59.562)
  Mid-Layer 1 w0.254: v1(18.288,69.449) 19.431,68.306 19.431,64.896 19.812,64.515 21.685,64.515 23.971,62.229 23.971,60.8 v1(22.733,59.562)
MCP2515_SCK2: R40.2 U2.13 | length 5.5
  Top Layer w0.254: U2.13@22.733,49.656 R40.2@22.733,55.183
MCP2515_TX0RTS1: R32.1 U1.25 | length 35.1
  Top Layer w0.254: R32.1@7.6,52.7 v1(9.2,52.7) ; U1.25@20.279,67.049 21.203,67.049 v1(21.844,67.69)
  Mid-Layer 1 w0.254: v1(9.2,52.7) 24.126,52.7 25.1,53.674 25.1,62.5 21.844,65.756 v1(21.844,67.69)
MCP2515_TX0RTS2: R32.2 U2.4 | length 19.7
  Top Layer w0.254: R32.2@7.493,51.119 7.493,50.037 8.096,49.434 11.787,49.434 14.74,46.481 18.415,46.481 20.066,44.83 U2.4
MCP2515_TX1RTS1: R31.1 U1.29 | length 23
  Top Layer w0.254: R31.1 v1@11.04,54.94 ; v1(15.2,68.2) 15.2,69 16.449,70.249 U1.29@20.279,70.249
  Mid-Layer 1 w0.254: v1(11.1,55) 11.1,57.1 13.4,59.4 13.4,65 15.2,66.8 v1(15.2,68.2)
MCP2515_TX1RTS2: R31.2 U2.5 | length 16.8
  Top Layer w0.254: R31.2@11.5,51.5 11.5,50.475 14.986,46.989 18.669,46.989 21.336,44.322 U2.5
MCP2515_TX2RTS: R30.2 U2.6 | length 12.7
  Top Layer w0.254: U2.6 22.606,44.156 R30.2@29.328,50.878
MCP2515_TXCAN1: R15.2 U2.1 | length 5.1
  Top Layer w0.254: R15.2@13.589,43.499 15.555,43.499 16.256,42.798 U2.1@16.256,40.639
MCP2515_TXCAN2: R15.1 U4.1 | length 7.3
  Top Layer w0.254: U4.1@7.747,47.811 12.386,47.811 13.081,47.116 R15.1@13.081,45.465
MCP2515_XTAL1: C19.1 U2.8 Y2.2 | length 13.5
  Top Layer w0.254: U2.8 25.146,39.496 26.543,38.099 29.845,38.099 30.734,38.988 Y2.2
MCP2515_XTAL2: C20.2 U2.7 Y2.1 | length 11.1
  Top Layer w0.254: U2.7 23.876,44.068 26.684,46.876 Y2.1 C20.2@28.884,48.695
MISO: J3.1 U1.1 | length 5.6
  Top Layer w0.254: U1.1@18.929,73.999 18.929,74.935 19.199,75.205 J3.1@23.493,75.205
MOSI: J3.4 U1.2 | length 13.2
  Top Layer w0.254: U1.2@18.129,73.999 18.129,72.675 18.288,72.516 18.796,72.516 20.447,74.167 27.559,74.167 27.933,73.793 J3.4@27.933,72.665
NetR11_1: R11.1 U3.4 | length 12.1
  Top Layer w0.254: R11.1@18.161,81.467 18.161,82.93 17.653,83.438 17.653,86.486 18.161,86.994 22.225,86.994 22.606,86.613 U3.4
NetR12_2: R12.2 U3.1 | length 4.1
  Top Layer w0.254: U3.1 18.796,83.692 20.193,82.295 R12.2@20.193,81.467
RESET: C7.2 J3.5 R10.1 U1.31 | length 18.3
  Top Layer w0.254: U1.31@20.279,71.849 20.987,71.849 22.606,70.23 J3.5@24.765,70.23 ; C7.2@22.225,79.667 R10.1@23.837,79.667 ; J3.5@23.493,70.125 24.406,70.125 v1(25.781,71.5) ; v1(24.257,77.938) R10.1@24.257,79.567
  Mid-Layer 1 w0.254: v1(24.257,77.938) 24.257,76.453 25.781,74.929 v1(25.781,71.5)
SCK: J3.3 U1.12 | length 12
  Top Layer w0.254: U1.12@11.979,70.249 15.64,70.249 16.383,70.992 v1(17.526,70.992) ; v1@22.479,71.811 J3.3@22.479,72.643
  Mid-Layer 1 w0.254: v1(17.526,70.992) 20.701,70.992 21.463,71.754 v1(22.479,71.754)
SPLIT_BMS: C15.2 R18.1 R19.2 U4.5 | length 7.7
  Top Layer w0.4: C15.2@3.525,34.925 3.525,39.35 3.525,40.4 4.064,40.939 U4.5
SPLIT_CHASSIS: C14.2 R16.2 R17.1 U3.5 | length 54.5
  Top Layer w0.4: C14.2@16.129,92.543 17.741,92.543 18.227,93.029 18.227,96.077 19.304,97.154 19.304,100.837 12.954,107.187 12.954,109.6 13.589,110.235 21.971,110.235 26.175,106.031 26.175,101.575 24.191,99.591 24.191,93.532 22.606,91.947 U3.5
TJA10401_STB: R13.2 U3.8 | length 9.9
  Top Layer w0.254: R13.2@16.129,81.467 16.129,85.978 18.796,88.645 U3.8
TJA10402_STB: R23.2 U4.8 | length 20.8
  Top Layer w0.254: v1(4,55) R23.2@4,56.6 ; v1@7.874,39.75 U4.8
  Mid-Layer 1 w0.254: v1(4,55) 4,49.466 7.874,45.592 v1(7.874,40.004)
WAKE_OUT: J2.3 Q1.3 R51.2 | length 98.3
  Top Layer w0.254: v1(10.658,27.421) J2.3@13.449,27.421 ; R51.2@28.829,90.992 28.829,95.916 30.448,95.916 30.734,95.63 v1(30.734,94.995)
  Mid-Layer 1 w0.254: v1(10.658,27.421) 29.521,27.421 31.877,29.777 31.877,93.852 v1(30.734,94.995)
WAKE_OUT_G1: R24.1 U1.3 | length 24.5
  Top Layer w0.254: v1(17.329,72.643) U1.3@17.329,73.999 ; v1(23.876,90.169) R24.1@25.019,90.169
  Mid-Layer 1 w0.254: v1(17.329,72.643) 17.329,74.364 15.24,76.453 15.24,81.533 v1(23.876,90.169)
WAKE_OUT_G2: Q1.1 R24.2 | length 3.2
  Top Layer w0.254: R24.2@25.273,92.135 26.448,92.135 Q1.1@27.879,93.566
XTAL1: C1.2 U1.10 Y1.1 | length 4.9
  Top Layer w0.254: Y1.1@7.112,71.849 U1.10@11.979,71.849
XTAL2: C2.2 U1.11 Y1.2 | length 7.6
  Top Layer w0.254: Y1.2@7.239,66.42 7.239,67.944 10.344,71.049 U1.11@11.979,71.049
pads on no net: J1.5 J1.6 J2.6 J2.9 J4. U1.16 U1.30
copper on no net:
  other v3: 4,4 29,4 4,107.101 28.998,107.101

## Polygon pours and split planes (outlines as drawn)
GLV_VCC on Mid-Layer 1 "Top Layer-No Net" (solid, pour order 4): 32.3,21.6 0.7,21.6 0.7,104 0.7,104.4 5.7,109.4 6.5,110.2 8.4,110.2 26.6,110.2 31.3,105.5 32.3,104.5 32.3,21.6
BATT_SENSE_VDD on Mid-Layer 1 "Top Layer-No Net" (solid, pour order 2): 0.7,20.3 0.7,5.9 5.9,0.7 26.5,0.7 32.1,6.3 32.2,6.4 32.2,12.2 32.2,20.3 0.7,20.3
BATT_SENSE_GND on GNDplane (split plane): 32.49,4 32.491,3.984 32.483,3.751 32.456,3.503 32.412,3.258 32.35,3.016 32.272,2.78 32.176,2.55 32.065,2.327 31.937,2.112 31.795,1.908 31.639,1.713 31.469,1.531 31.287,1.361 31.092,1.205 30.888,1.063 30.673,0.935 30.45,0.824 30.22,0.728 29.984,0.65 29.742,0.588 29.497,0.544 29.249,0.517 29.016,0.509 29,0.51 4,0.51 3.984,0.509 3.751,0.517 3.503,0.544 3.258,0.588 3.016,0.65 2.78,0.728 2.55,0.824 2.327,0.935 2.112,1.063 1.908,1.205 1.713,1.361 1.531,1.531 1.361,1.713 1.205,1.908 1.063,2.112 0.935,2.327 0.824,2.55 0.728,2.78 0.65,3.016 0.588,3.258 0.544,3.503 0.517,3.751 0.509,3.984 0.51,4 0.51,20.498 32.49,20.498
GLV_GND on GNDplane (split plane): 29.249,110.483 29.497,110.456 29.742,110.412 29.984,110.35 30.22,110.272 30.45,110.176 30.673,110.065 30.888,109.937 31.092,109.795 31.287,109.639 31.469,109.469 31.639,109.287 31.795,109.092 31.937,108.888 32.065,108.673 32.176,108.45 32.272,108.22 32.35,107.984 32.412,107.742 32.456,107.497 32.483,107.249 32.491,107.016 32.49,107 32.49,21.502 0.51,21.502 0.51,107 0.509,107.016 0.517,107.249 0.544,107.497 0.588,107.742 0.65,107.984 0.728,108.22 0.824,108.45 0.935,108.673 1.063,108.888 1.205,109.092 1.361,109.287 1.531,109.469 1.713,109.639 1.908,109.795 2.112,109.937 2.327,110.065 2.55,110.176 2.78,110.272 3.016,110.35 3.258,110.412 3.503,110.456 3.751,110.483 3.984,110.491 4,110.49 29,110.49 29.016,110.491

## Other copper
GNDplane (plane layer: these items are gaps in the copper):
  lines w1: 0,21 33,21

## Silkscreen, mask and mechanical layers (free items; w line width, h text height)
Top Overlay:
  lines w0.254: 4.572,60.924 8.89,60.924 8.89,76.624 4.572,76.624 4.572,60.924
  lines w0.4: 0.619,20.954 32.431,20.954
  text "QUTMS Accumulator Control v1" at 0.889,102.869 h3 r270
  text "EV2014" at 0.889,57.149 h3 r270
  text "Cells" at 25.781,35.559 h3 r270
  text "HV ISOLATION" at 31.8,20.5 h2 r270
Mechanical 1:
  the board outline again, w0.254

## Text inside footprints (layer, text, board x,y; h text height)
J3: Top Overlay "1" at 21.598,77.047 h1.52 r270